# Altium PCB PCB1.PcbDoc
Units mm, origin at the board's own origin, x right, y up, seen from the top; angles counter-clockwise.
Board outline 54 x 19 mm, 2 copper layers (Top Layer, Bottom Layer); 110 components, 73 nets, 334 pads, 0 vias.
Unrouted connection lines stored in the file: 232.
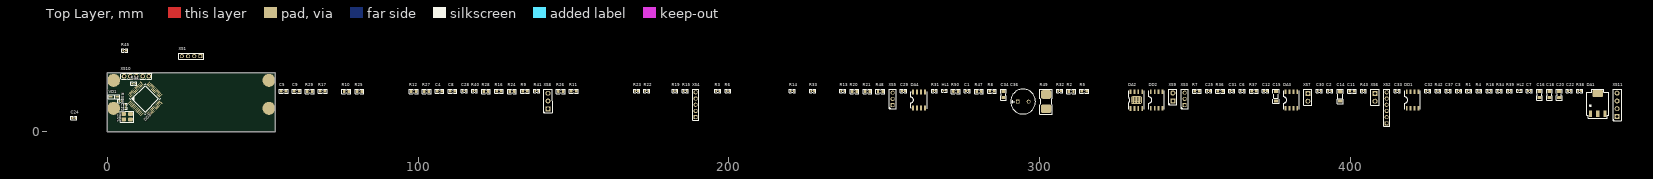
[diagram p0: Top Layer view]
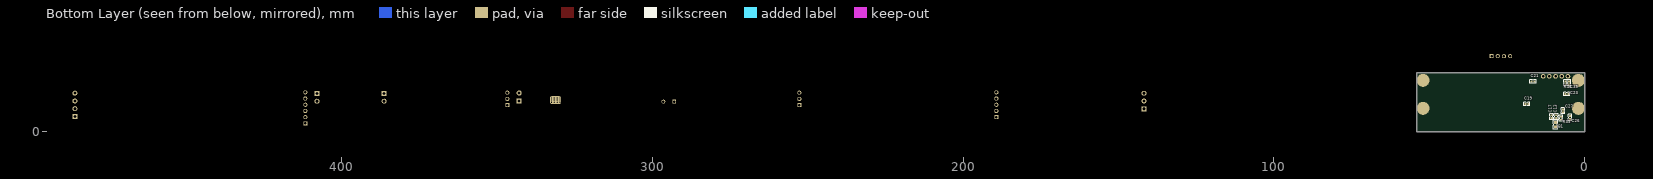
[diagram p1: Bottom Layer view, seen from below]

## Layer stack, top to bottom
Top Solder: solder mask 0.0102, Solder Resist, Dk 3.5
Top Layer: signal copper 0.0356
Dielectric 1: dielectric 0.32, FR-4, Dk 4.8
Bottom Layer: signal copper 0.0356
Bottom Solder: solder mask 0.0102, Solder Resist, Dk 3.5

## Board outline
0,0 54,0 54,19 0,19

## Design rules (kind name [scope] priority, off if disabled: settings)
AcuteAngle [All] p1: minimum=3.50000000000000E+0001 checktracksonly=FALSE
BoardOutlineClearance [All] p1: gap=0.25 ignorepadtopadclearanceinfootprint=FALSE except(0: Arc-SplitContinuation Track-SplitContinuation SMDPad-SplitContinuation THPad-SplitContinuation Via-SplitContinuation Fill-SplitContinuation Poly-SplitContinuation Region-SplitContinuation Text-SplitContinuation)
Clearance Clearance_KeepOutLayer [OnLayer('Keep-Out Layer') vs InNet('No Net')] p1: gap=0.5 ignorepadtopadclearanceinfootprint=FALSE
Clearance [All] p2: gap=0.2 ignorepadtopadclearanceinfootprint=FALSE except(0.25: Arc-Hole Track-Hole SMDPad-Hole THPad-Hole Via-Hole Fill-Hole Poly-Hole Region-Hole Text-Hole)
ComponentClearance [All] p1: gap=0.2 collisioncheckmode=3 verticalgap=0.2 showdistances=FALSE
HoleSize "HoleSize VIA" [IsVia] p1: absolutevalues=TRUE maxlimit=5.9 minlimit=0.3 maxpercent=80.000 minpercent=20.000
HoleSize [IsPad] p2: absolutevalues=TRUE maxlimit=5.9 minlimit=0.6 maxpercent=80.000 minpercent=20.000
HoleToHoleClearance [All] p1: gap=0.25 allowstackedmicrovias=TRUE
MinimumAnnularRing "MinimumAnnularRing VIA" [All] p1: minimumring=0.15
MinimumAnnularRing "MinimumAnnularRing PAD" [IsPAD] p2: minimumring=0.2
MinimumSolderMaskSliver [All] p1: minsoldermaskwidth=0.15
PlaneClearance [All] p1: clearance=0.2
PlaneConnect [All] p1: pad.planeconnectstyle=Relief pad.reliefexpansion=0.2 pad.reliefentries=4 pad.reliefconductorwidth=0.2 pad.reliefairgap=0.2 via.planeconnectstyle=Direct via.reliefexpansion=0.2 via.reliefentries=4 via.reliefconductorwidth=0.2 via.reliefairgap=0.2
PolygonConnect PolygonConnect_Via [IsVia] p1: connectstyle=Direct reliefconductorwidth=0.254 reliefentries=4 polygonreliefangle="90 Angle" airgapwidth=0.254
PolygonConnect [All] p2: thpad.connectstyle=Relief thpad.reliefconductorwidth=0.2 thpad.reliefentries=4 thpad.polygonreliefangle="90 Angle" thpad.airgapwidth=0.2 smdpad.connectstyle=Relief smdpad.reliefconductorwidth=0.2 smdpad.reliefentries=4 smdpad.polygonreliefangle="90 Angle" smdpad.airgapwidth=0.2 via.connectstyle=Direct via.reliefconductorwidth=0.25 via.reliefentries=4 via.polygonreliefangle="90 Angle" via.airgapwidth=0.25
RoutingVias [All] p1: holewidth=0.3 width=0.6 viastyle="Through Hole" minholewidth=0.2 minwidth=0.4 maxholewidth=5.9 maxwidth=6.4
SilkToSilkClearance [All] p1: silktosilkclearance=0
SilkToSolderMaskClearance [IsPad] p1: minsilkscreentomaskgap=0.15 clearancetoexposedcopper=TRUE
SolderMaskExpansion [All] p1: expansion=0.05 istentingtop=FALSE
Width [All] p1: maxlimit=5 minlimit=0.15 preferedwidth=0.25
22 further rules are at their usual default settings.

## Components (designator, comment, footprint, x,y, rotation, side; value= is the part's Value field where it differs from the comment)
B1 "BLM18PG181SN1D" Ferrite_Bead_0603 9.325,2.25 r90 bottom
C1 "4700p" 0402_CAP 276.817,13.103 r0 top
C2 "0.1u" 0402_CAP 393.422,13.078 r0 top
C3 "1.8n" 0402_CAP 434.924,13.103 r0 top
C4 "100n" 0603_CAP 106.933,12.978 r0 top
C5 "100n" 0603_CAP 56.731,13.003 r0 top
C6 "0.1u" 0402_CAP 365.271,13.103 r0 top
C7 "0,1" 0402_CAP 457.726,13.103 r0 top
C8 "100n" 0603_CAP 111.109,12.978 r0 top
C9 "100n" 0603_CAP 60.931,12.978 r0 top
C10 "2.2u" 0402_CAP 5.775,8.225 r270 top
C11 "100n" 0603_CAP 400.623,13.003 r0 top
C12 "0.1u" 0402_CAP 372.771,13.078 r0 top
C13 "4.7u" 0402_CAP 9.125,4.85 r270 bottom
C14 "22Ux16V" "CASE A" 396.798,11.353 r90 top
C15 "22Ux16V" "CASE A" 376.147,11.378 r90 top
C16 "47p" 0805_cap 460.976,11.928 r90 top
C17 "0.1u" 0402_CAP 10.65,4.85 r270 bottom
C18 "47p" 0805_cap 464.151,11.928 r90 top
C19 "0.1u" 0402_CAP 18.565,8.85 r0 bottom
C20 "10p" 0805_cap 467.326,11.928 r90 top
C21 "0.1u" 0402_CAP 16.61,16.075 r0 bottom
C22 "0.1" 0402_CAP 470.576,13.078 r0 top
C23 "0.1u" 0402_CAP 5.71,12.075 r180 bottom
C24 "0.1u" 0402_CAP -10.8,4.325 r0 top
C25 "1.0n" 0402_CAP 354.445,13.078 r0 top
C26 "18p" 0402_CAP 4.65,4.55 r270 bottom
C27 "18p" 0402_CAP 6.975,6.65 r270 bottom
C28 "100n" 0402_CAP 114.859,13.078 r0 top
C29 "0.1u" 0402_CAP 256.241,13.078 r0 top
C30 "0.1u" 0402_CAP 390.097,13.078 r0 top
C31 "1.0n" 0402_CAP 361.946,13.103 r0 top
C32 "15p" 0402_CAP 424.999,13.078 r0 top
C33 "15p" 0402_CAP 415.173,13.103 r0 top
C34 "0.22x50" 0805_cap 288.442,11.928 r90 top
C35 "100n" 0402_CAP 4.975,15.665 r270 bottom
C36 "100x50" "cap pol D8" 294.743,9.678 r0 top
C37 "0.1" 0402_CAP 431.599,13.103 r0 top
DA1 "1117M3-L-3-3" "SOT-223 (3)" 479.727,9.253 r90 top
DA2 "A4950ELJTR-T" SOIC-8-ER 331.219,10.153 r90 top
DA3 "ACS712-5" SOIC-8 381.122,10.178 r90 top
DA4 "INA826AIDR" SO-8? 261.241,10.178 r90 top
DD1 "MAX3490EESA" SOIC-8 420.099,10.178 r90 top
DD2 "SN65HVD230DR" SOIC-8 337.72,10.178 r90 top
DD3 "GD32F303C" LQFP-48 12.125,10.525 r45 top
HL1 "Зелёный" 0402_LED_GREEN 269.391,13.153 r0 top
HL2 "Зелёный" 0402_LED_GREEN 454.475,13.128 r0 top
R1 "4k7" 0402_res 438.225,13.128 r0 top
R2 "62" 0603_RES 310.218,12.953 r0 top
R3 "10k" 0402_res 196.488,13.128 r0 top
R4 "120" 0402_res 441.5,13.103 r0 top
R5 "62" 0603_RES 314.419,12.978 r0 top
R6 "10k" 0402_res 199.763,13.128 r0 top
R7 "10k" 0603_RES 350.695,12.978 r0 top
R8 "0" 0603_RES 284.767,12.978 r0 top
R9 "22" 0603_RES 134.435,12.978 r0 top
R10 "22" 0603_RES 76.907,12.953 r0 top
R11 "5k1" 0603_RES 150.11,12.978 r0 top
R12 "5k1" 0603_RES 98.583,12.953 r0 top
R13 "22" 0402_res 236.715,13.128 r0 top
R14 "22" 0402_res 220.439,13.103 r0 top
R15 "22" 0402_res 185.987,13.128 r0 top
R16 "10k" 0603_RES 126.059,12.978 r0 top
R17 "10k" 0603_RES 69.282,12.978 r0 top
R18 "4k7" 0402_res 444.775,13.128 r0 top
R19 "22" 0402_res 182.712,13.128 r0 top
R20 "2к" 0603_RES 240.44,12.953 r0 top
R21 "2к" 0603_RES 244.615,12.953 r0 top
R22 "22" 0402_res 173.612,13.103 r0 top
R23 "22" 0402_res 170.336,13.103 r0 top
R24 "22" 0603_RES 130.26,12.953 r0 top
R25 "22" 0603_RES 81.107,12.953 r0 top
R26 "5k1" 0603_RES 145.91,12.953 r0 top
R27 "5k1" 0603_RES 102.758,12.953 r0 top
R28 "10k" 0603_RES 121.884,12.953 r0 top
R29 "10k" 0603_RES 65.106,12.953 r0 top
R30 "220" 0402_res 4.225,9.9 r180 top
R31 "470" 0402_res 266.216,13.128 r0 top
R32 "10k" 0402_res 306.493,13.103 r0 top
R33 "10k" 0402_res 226.989,13.128 r0 top
R34 "470" 0402_res 448.05,13.103 r0 top
R35 "220" 0402_res 7.65,4.35 r90 bottom
R36 "10k" 0603_RES 358.196,12.978 r0 top
R37 "18k" 0603_RES 369.021,12.978 r0 top
R38 "1k" 0402_res 473.876,13.128 r0 top
R39 "1k" 0402_res 451.325,13.128 r0 top
R40 "10k" 0402_res 118.159,13.103 r0 top
R41 "5k1" 0402_res 138.16,13.103 r0 top
R42 "10k" 0402_res 428.299,13.103 r0 top
R43 "10k" 0402_res 404.323,13.103 r0 top
R44 "10k" 0402_res 8.53,15.425 r180 top
R45 "10k" 0402_res 5.526,26.1 r0 top
R46 "10k" 0402_res 6.2,15.675 r270 bottom
R47 "10k" 0603_RES 280.592,12.953 r0 top
R48 "12k" 0603_RES 248.79,12.953 r0 top
R49 "0.1" 2512_res 302.143,9.653 r90 top
R50 "10k" 0603_RES 273.066,12.953 r0 top
VD1 "BAT60B" SOD-323 2.095,11.25 r180 top
XS1 "TTL" PH4_2mm 26.95,24.275 r180 top
XS2 "SSI" PH6_2mm 411.773,5.653 r90 top
XS3 "CAN" PH3_2mm 346.745,10.528 r90 top
XS4 "SPI" PH5_2mm 189.337,7.653 r90 top
XS5 "I2C or UART" PH3_2mm 252.741,10.528 r90 top
XS6 "power_12v" "STEP_2.54mm 2X1" 408.023,12.328 r0 top
XS7 "power_5v" "STEP_2.54mm 2X1" 386.397,12.328 r0 top
XS8 "POT" step_2.5_3pin 141.81,7.353 r90 top
XS9 "OUT" step_2.54_2 342.945,9.903 r90 top
XS10 "SWD" jumper_5pin_step2mm 9.35,17.8 r180 top
XS11 "ENC" step_2.5_4pin 485.952,4.878 r90 top
ZQ1 "8MHz" KX-7T 6.325,4.8 r0 top

## Footprints (in the part's own frame and the unit in brackets; to place one, negate y for a bottom-side part, rotate by r counter-clockwise, add the part's x,y. Pads: shape width x height; smd on the part's side, far side on the other; paste and mask are expansions set on the pad)
0402_CAP [mm]
  rrect50% 0.55x0.65 smd: 1(-0.465,0) 2(0.465,0)
  silkscreen extent -0.97,-0.58 0.97,0.58, body extent -0.5,-0.22 0.5,0.28, height 0.5
0402_LED_GREEN [mm]
  rrect50% 0.5x0.5 smd: A(-0.4,0) K(0.4,0)
  silkscreen extent -0.85,-0.5 0.87,0.5, body extent -0.5,-0.25 0.5,0.25, height 0.4
0402_res [mm]
  rrect20% 0.5x0.6 smd: 1(-0.455,0) 2(0.455,0)
  silkscreen extent -0.95,-0.55 0.95,0.55, body extent -0.5,-0.25 0.5,0.25, height 0.35
0603_CAP [mm]
  rrect25% 0.8x0.9 smd: 1(-0.75,0) 2(0.75,0)
  silkscreen extent -1.4,-0.7 1.4,0.7, body extent -0.8,-0.4 0.8,0.4, height 0.8
0603_RES [mm]
  rrect25% 0.8x0.9 smd: 1(-0.75,0) 2(0.75,0)
  silkscreen extent -1.4,-0.7 1.4,0.7, body extent -0.8,-0.41 0.8,0.41, height 0.45
0805_cap [mm]
  rrect25% 1x1.35 smd: 1(-1,0) 2(1,0)
  silkscreen extent -1.75,-0.9 1.75,0.9, body extent -1,-0.63 1,0.63, height 1.45
2512_res [mm]
  rrect50% 2.8x3.4 smd: 1(-2.3,0) 2(2.3,0)
  silkscreen extent -4,-2 4,2, body extent -3.15,-1.55 3.15,1.55, height 0.55
"cap pol D8" [mm]
  rrect25% 1.2x1.2 hole 0.8: 1(-1.75,0)
  round 1.2 hole 0.8: 2(1.75,0)
  silkscreen extent -4,-4 4,4, body extent -4,-4 4,4, height 11.5
"CASE A" [mm]
  rrect25% 1x1.4 smd: 1(-1.5,0) 2(1.5,0)
  silkscreen extent -2.3,-1 2.3,1, body extent -1.6,-0.8 1.6,0.8, height 1.6
Ferrite_Bead_0603 [mm]
  rrect50% 0.9x1.1 smd: 1(-0.7,0) 2(0.7,0)
  silkscreen extent -1.43,-0.75 1.43,0.75, body extent -0.77,-0.48 0.83,0.48, height 0.8
jumper_5pin_step2mm [mm]
  round 1.5 hole 0.8: 1(-4,0) 2(-2,0) 3(0,0) 4(2,0) 5(4,0)
  silkscreen extent -5,-1 5,1, body extent -5,-1 5,1, height 5.21
KX-7T [mm]
  rrect50% 1.5x1.3 smd: 1(-1.1,-0.85) 2(1.1,0.85) GND(-1.1,0.85) GND(1.1,-0.85)
  silkscreen extent -2.2,-1.8 2.2,1.8, body extent -1.61,-1.25 1.61,1.25, height 0.81
LQFP-48 [mm]
  rrect50% 1.5x0.3 smd: 1(-4.25,2.75) 2(-4.25,2.25) 3(-4.25,1.75) 4(-4.25,1.25) 5(-4.25,0.75) 6(-4.25,0.25) 7(-4.25,-0.25) 8(-4.25,-0.75) 9(-4.25,-1.25) 10(-4.25,-1.75) 11(-4.25,-2.25) 12(-4.25,-2.75) 25(4.25,-2.75) 26(4.25,-2.25) 27(4.25,-1.75) 28(4.25,-1.25) 29(4.25,-0.75) 30(4.25,-0.25) 31(4.25,0.25) 32(4.25,0.75) 33(4.25,1.25) 34(4.25,1.75) 35(4.25,2.25) 36(4.25,2.75)
  rrect50% 0.3x1.5 smd: 13(-2.75,-4.25) 14(-2.25,-4.25) 15(-1.75,-4.25) 16(-1.25,-4.25) 17(-0.75,-4.25) 18(-0.25,-4.25) 19(0.25,-4.25) 20(0.75,-4.25) 21(1.25,-4.25) 22(1.75,-4.25) 23(2.25,-4.25) 24(2.75,-4.25) 37(2.75,4.25) 38(2.25,4.25) 39(1.75,4.25) 40(1.25,4.25) 41(0.75,4.25) 42(0.25,4.25) 43(-0.25,4.25) 44(-0.75,4.25) 45(-1.25,4.25) 46(-1.75,4.25) 47(-2.25,4.25) 48(-2.75,4.25)
  silkscreen extent -3.5,-3.5 3.5,3.5, body extent -4.5,-4.5 4.5,4.5, height 1.6
PH3_2mm [mm]
  rect 1.308x1.308 / inner round 1.308 / far side rect 1.308x1.308 hole 0.8: 1(-2,0)
  round 1.308 hole 0.8: 2(0,0) 3(2,0)
  silkscreen extent -3.13,-1.15 3.13,1.12
PH4_2mm [mm]
  rect 1.308x1.308 / inner round 1.308 / far side rect 1.308x1.308 hole 0.8: 1(-3,0)
  round 1.308 hole 0.8: 2(-1,0) 3(1,0) 4(3,0)
  silkscreen extent -4,-1.02 4,1
PH5_2mm [mm]
  rect 1.308x1.308 / inner round 1.308 / far side rect 1.308x1.308 hole 0.8: 1(-3,0)
  round 1.308 hole 0.8: 2(-1,0) 3(1,0) 4(3,0) 5(5,0)
  silkscreen extent -4,-1.03 6,1
PH6_2mm [mm]
  rect 1.308x1.308 / inner round 1.308 / far side rect 1.308x1.308 hole 0.8: 1(-3,0)
  round 1.308 hole 0.8: 2(-1,0) 3(1,0) 4(3,0) 5(5,0) 6(7,0)
  silkscreen extent -4,-1.04 8,1
SO-8? [mm]
  rrect25% 1.65x0.61 smd: 1(-2.63,1.905) 2(-2.63,0.635) 3(-2.63,-0.635) 4(-2.63,-1.905) 5(2.63,-1.905) 6(2.63,-0.635) 7(2.63,0.635) 8(2.63,1.905)
  silkscreen extent -2.63,-2.63 2.63,2.63, body extent -3,-2.45 3,2.45, height 1.75
SOD-323 [mm]
  rrect25% 1.21x0.5 smd: A(1.105,0) K(-1.105,0)
  silkscreen extent -1.88,-0.63 1.88,0.63, body extent -1.25,-0.63 1.25,0.63, height 1.1
SOIC-8 [mm]
  rrect25% 1.5x0.55 smd: 1(-2.7,1.905) 2(-2.7,0.635) 3(-2.7,-0.635) 4(-2.7,-1.905) 5(2.7,-1.905) 6(2.7,-0.635) 7(2.7,0.635) 8(2.7,1.905)
  silkscreen extent -3,-2.54 3,2.54, body extent -3,-2.45 3,2.45, height 1.75
SOIC-8-ER [mm]
  rrect25% 1.5x0.55 smd: 1(-2.7,1.905) 2(-2.7,0.635) 3(-2.7,-0.635) 4(-2.7,-1.905) 5(2.7,-1.905) 6(2.7,-0.635) 7(2.7,0.635) 8(2.7,1.905)
  round 0.4 hole 0.4: 1(-0.7,1.4) 1(-0.7,-0.4) 1(-0.7,0.5) 1(-0.7,-1.3) 1(0,1.4) 1(0,0.5) 1(0,-0.4) 1(0,-1.3) 1(0.7,1.4) 1(0.7,-0.4) 1(0.7,0.5) 1(0.7,-1.3)
  rrect50% 2.5x3.6 all layers, no hole: 1(0,0)
  silkscreen extent -3,-2.54 3,2.54, body extent -3,-2.45 3,2.45, height 1.7
"SOT-223 (3)" [mm]
  rrect25% 2.15x1 smd: 1(-3.5,2.3) 2(-3.5,0) 3(-3.5,-2.3)
  rrect25% 2.15x3.4 smd: 2(3,0)
  silkscreen extent -4.9,-3.5 4.4,3.5, body extent -3.75,-3.25 3.25,3.25, height 1.64
step_2.5_3pin [mm]
  rect 1.6x1.6 hole 1: 1(0,0)
  round 1.6 hole 1: 2(2.5,0) 3(5,0)
  silkscreen extent -1.3,-1.3 6.3,1.3
step_2.5_4pin [mm]
  rect 1.6x1.6 hole 1: 1(0,0)
  round 1.6 hole 1: 2(2.5,0) 3(5,0) 4(7.5,0)
  silkscreen extent -1.3,-1.3 8.8,1.3
step_2.54_2 [mm]
  rect 1.6x1.6 hole 1: 1(0,0)
  round 1.6 hole 1: 2(2.54,0)
  silkscreen extent -1.25,-1.25 3.75,1.25
"STEP_2.54mm 2X1" [mm]
  rect 1.6x1.6 hole 1: 1(0,0)
  round 1.6 hole 1: 2(0,-2.54)
  silkscreen extent -1.33,-3.83 1.33,1.33

## Part data
B1: library part "Ferrite Bead"
C1 C2 C3 C6 C7 C10 C12 C13 C17 C19 C21 C22 C23 C24 C25 C26 C27 C28 C29 C30 C31 C32 C33 C35 C37: library part Capacitor, Case=0402, ValueType=Конденсатор
C4 C5 C8 C9 C11: library part Capacitor, Case=0603, ValueType=Конденсатор
C14 C36: library part Capacitor_pol, ValueType=Конденсатор
C15: library part Capacitor_pol, Case=TYPE(A), ValueType=Конденсатор
C16 C18 C20 C34: library part Capacitor, Case=0805, ValueType=Конденсатор
DA2: ValueDescriptioneter 1=Full-Bridge, ValueManufacturer="Allegro Microsystems", ValueType="ШИМ драйвер двигателей", ComponentLink1Description=chipdip, ComponentLink1URL=https://www.chipdip.ru/product/a4950eljtr-t, NomenclatureNumber=9001130282
DA3: library part CurrentSensor_ACS712-5
DD1: ValueManufacturer="Analog Devices", ComponentLink1Description=chipdip, ComponentLink1URL=https://www.chipdip.ru/product0/8002979238?ysclid=m3rd7su6kb974072814, NomenclatureNumber=8002979238
DD3: Case=LQFP-48, ValueDescription=Микроконтроллер, ValueManufacturer="Giga Device", ValueManufacturerPartNumber=GD32F303C, ValueType=Микроконтроллер
HL1 HL2: library part Led_green, Case=0603, Temp=-40°C...+85°C, ValueDescription=Светодиод, ValueManufacturer=Foryard, ValueManufacturerPartNumber=fyls-0603ugc, ValueType=Светодиод
R1 R3 R4 R6 R13 R14 R18 R23 R32 R33 R35 R38 R39 R42 R43 R44 R45 R46: library part Resistor, Case=0402, ValueType=Резистор
R2 R5 R7 R8 R11 R12 R16 R17 R20 R21 R26 R27 R28 R29 R36 R37 R40 R41 R47 R48 R50: library part Resistor, Case=0603, ValueType=Резистор
R9 R10 R24 R25: library part Resistor, Power=0603, ValueType=Резистор
R15 R19 R22 R30 R31 R34: library part Resistor, Power=0402, ValueType=Резистор
R49: library part Resistor, Case=2512, ValueType=Резистор
VD1: library part DiodeSch_BAT60B, ValueManufacturer="NXP Semiconductors", ValueManufacturerPartNumber=BAT254
XS10: library part swd_JUMPER_5pin
ZQ1: library part Quartz, ValueType="Кварцевый резонатор"
DA4: ComponentLink1Description=chipdip, ComponentLink1URL=https://www.chipdip.ru/product0/8026300979

## Free pads (board coordinates)
  round 4.2 all layers, no hole: 2(2,7.5) 20(2,16.5) 20(52,7.5) 20(52,16.5)

## Nets (pads, with @x,y where several pads share a name; then routed paths per layer and width w, separated by ;. In a path a pad name is that pad's centre, name@x,y a point inside that pad or via, vN(x,y) a via of type N, cw(c..) or ccw(c..) an arc to the next point about the centre after c; other vN are vias at no path point)
3V3: B1.1 C6.2 C16.1 C18.1 C19.1 C20.1 C21.1 C22.1 C23.1 C24.1 C29.1 DA1.2 DA2.4 DA4.8 DD1.1 DD2.3 DD3.24 DD3.36 DD3.48 HL1.A HL2.A R20.2 R21.2 R44.2 R45.2 R46.2 VD1.A XS10.1
+5V: C2.2 C7.1 C12.1 C15.1 C30.2 C37.1 DA1.3 DA3.8 R1.1 R3.2 R6.2 R11.2 R12.2 R26.2 R27.2 R42.2 R43.2 XS2.5 XS7.1 XS8.2 XS11.3
+12V: C11.1 C14.1 C34.1 C36.1 DA2.5 XS6.1
AN_ACS: C25.2 DD3.13 R36.2 R37.1
CLK: DD3.37 R44.1 XS10.2
DIO: DD3.34 R45.1 XS10.4
ENC_A: DD3.40 R38.1
ENC_B: DD3.41 R39.1
GND: C1.2 C2.1 C4.2 C5.2 C6.1 C7.2 C8.2 C9.2 C10.2 C11.2 C12.2 C13.1 C14.2 C15.2 C16.2 C17.1 C18.2 C19.2 C20.2 C21.2 C22.2 C23.2 C24.2 C25.1 C26.2 C27.2 C28.2 C29.2 C30.1 C31.1 C32.1 C33.1 C35.2 C37.2 DA1.1 DA2.1 DA3.5 DA4.5 DA4.6 DD1.4 DD2.2 DD3.8 DD3.23 DD3.35 DD3.47 R7.2 R16.1 R17.1 R18.2 R28.1 R29.1 R32.2 R33.2 R34.1 R36.1 R40.1 R49.2 R50.2 XS3.3 XS4.5 XS5.3 XS6.2 XS7.2 XS8.3 XS10.3 XS11.4
GND_DRIVE: C34.2 C36.2
I2C_SCL/USART_TX: DD3.42 R13.2 R21.1
I2C_SCL/USART_TX_OUT: R13.1 XS5.1
I2C_SDA/USART_RX: DD3.43 R14.2 R20.1
I2C_SDA/USART_RX_OUT: R14.1 XS5.2
IN1: DA2.3 DD3.29
IN2: DA2.2 DD3.30
INA826OUT: DA4.7 DD3.14
M\C\L\R\: C35.1 DD3.7 R46.1 XS10.5
NetB1_2: B1.2 C13.2 C17.2 DD3.9
NetC1_1: C1.1 R2.1 R5.1 R8.1
NetC3_1: C3.1 R4.2
NetC3_2: C3.2 DD1.7 R18.1 XS2.2
NetC10_1: C10.1 DD3.1 R30.1
NetC26_1: C26.1 R35.1 ZQ1.1
NetC27_1: C27.1 DD3.5 ZQ1.2
NetC31_2: C31.2 DA3.6
NetC32_2: C32.2 R38.2 R42.1 XS11.1
NetC33_2: C33.2 R39.2 R43.1 XS11.2
NetDA2_6: DA2.6 DA3.3 DA3.4
NetDA2_7: DA2.7 R47.2 R49.1
NetDA2_8: DA2.8 XS9.2
NetDA3_1: DA3.1 DA3.2 XS9.1
NetDA3_7: DA3.7 R37.2
NetDA4_1: DA4.1 R50.1
NetDA4_2: DA4.2 R48.1
NetDA4_3: DA4.3 R48.2
NetDA4_4: DA4.4 R47.1
NetDD1_5: DD1.5 XS2.3
NetDD1_6: DD1.6 XS2.4
NetDD1_8: DD1.8 R1.2 R4.1 XS2.1
NetDD2_5: DD2.5 R8.2
NetDD2_6: DD2.6 R5.2 XS3.2
NetDD2_7: DD2.7 R2.2 XS3.1
NetDD2_8: DD2.8 R7.1
NetDD3_6: DD3.6 R35.2
NetDD3_20: DD3.20 R32.1
NetDD3_31: DD3.31 R31.1
NetDD3_44: DD3.44 R33.1
NetHL1_K: HL1.K R31.2
NetHL2_K: HL2.K R34.2
NetR3_1: R3.1 R19.2 XS4.2
NetR6_1: R6.1 R22.2 XS4.3
NetR15_2: R15.2 XS4.1
NetR23_1: R23.1 XS4.4
NetR30_2: R30.2 VD1.K
NetR41_2: R41.2 XS8.1
pot: C28.1 DD3.12 R40.2 R41.1
RX(CAN): DD2.4 DD3.32
SPI_MISO: DD3.27 R19.1
SPI_MOSI: DD3.28 R15.1
SPI_SCLK: DD3.26 R22.1
SPI_SS: DD3.25 R23.2
SSI_MISO: DD1.2 DD3.16
SSI_SCK: DD1.3 DD3.15
TTL_A_IN: R9.2 XS1.1
TTL_A_IN_GPIO: C4.1 DD3.38 R9.1 R11.1 R16.2
TTL_A_OUT: R10.2 XS1.2
TTL_A_OUT_GPIO: C5.1 DD3.45 R10.1 R12.1 R17.2
TTL_B_IN: R24.2 XS1.3
TTL_B_IN_GPIO: C8.1 DD3.17 R24.1 R26.1 R28.2
TTL_B_OUT: R25.2 XS1.4
TTL_B_OUT_GPIO: C9.1 DD3.46 R25.1 R27.1 R29.2
TX(CAN): DD2.1 DD3.33
pads on no net: DD3.2 DD3.3 DD3.4 DD3.10 DD3.11 DD3.18 DD3.19 DD3.21 DD3.22 DD3.39 XS2.6 ZQ1.GND

## Silkscreen, mask and mechanical layers (free items; w line width, h text height)
Mechanical 1:
  lines w0.15: 0,0.075 54,0.075 54,19 0,19 0,0.075